# EAGLE board clock (EAGLE 7.1.0)

Size 100 x 80 mm. Coordinates in mm from the lower left corner, seen from the top.
Outline: 0,0 100,0 100,80 0,80 0,0
Copper layers (1*16): Top 0.035mm / dielectric 1.5mm / Bottom 0.035mm
Design rules "default": minimum track width 10mil, minimum drill 24mil, track to track 8mil, track to pad 8mil, pad to pad 8mil, via to via 8mil, smd to smd 8mil, copper to edge 40mil, drill to drill 8mil, minimum pad ring 10mil, minimum via ring 8mil, stop-mask expansion 4mil, vias tented up to drill 0mil, thermal gap 10mil

## Footprints (pad centres in the part's own frame; a part is rotated, then mirrored left to right if it is on the bottom)
1X06 = drill 1.016 long: 1 -6.35,0; 2 -3.81,0; 3 -1.27,0; 4 1.27,0; 5 3.81,0; 6 6.35,0
DIL20 = drill 0.813 long: 1 -11.43,-3.81; 2 -8.89,-3.81; 3 -6.35,-3.81; 4 -3.81,-3.81; 5 -1.27,-3.81; 6 1.27,-3.81; 7 3.81,-3.81; 8 6.35,-3.81; 9 8.89,-3.81; 10 11.43,-3.81; 11 11.43,3.81; 12 8.89,3.81; 13 6.35,3.81; 14 3.81,3.81; 15 1.27,3.81; 16 -1.27,3.81; 17 -3.81,3.81; 18 -6.35,3.81; 19 -8.89,3.81; 20 -11.43,3.81
LD-S400UHR-C = drill 1 long: 1 -10.62,-53.04; 2 -5.54,-53.05; 3 -0.46,-53.08; 4 4.62,-53.08; 5 9.7,-53.08; 6 12.24,53.5; 7 7.16,53.5; 8 2.08,53.5; 9 -3,53.5; 10 -8.08,53.5
SA23-12SRWA = drill 1 long: 1 -5.08,-30.08; 2 -2.54,-30.08; 3 0,-30.08; 4 2.54,-30.08; 5 5.08,-30.08; 6 5.08,29.98; 7 2.54,29.98; 8 0,29.98; 9 -2.54,29.98; 10 -5.08,29.98
TO220BV = drill 1.016 long: D 0,-2.54; G -2.54,-2.54; S 2.54,-2.54
TO92 = drill 0.813 octagon: 1 1.27,0; 2 0,1.905; 3 -1.27,0
0207/12 = drill 0.813 octagon: 1 -6.35,0; 2 6.35,0

## Placement (x,y rotation side)
CONTROL  JP_1  [1X06]  -94.31,248.92 0 top  (outside the outline)
IC1  TPIC6B595N  [DIL20]  25.07,252.73 0 top  (outside the outline)
IC2  TPIC6B595N  [DIL20]  -2.87,252.73 0 top  (outside the outline)
LED_BIG_1  7-SEG_LD-S400UHR-C  [LD-S400UHR-C]  41.58,62.23 0 top
LED_BIG_2  7-SEG_LD-S400UHR-C  [LD-S400UHR-C]  -48.59,62.23 0 top  (outside the outline)
LED_BIG_3  7-SEG_LD-S400UHR-C  [LD-S400UHR-C]  41.58,185.42 0 top  (outside the outline)
LED_BIG_4  7-SEG_LD-S400UHR-C  [LD-S400UHR-C]  -48.59,185.42 0 top  (outside the outline)
LED_SMALL_1  7-SEG_SA23-12SRWA  [SA23-12SRWA]  -118.44,158.75 0 top  (outside the outline)
LED_SMALL_2  7-SEG_SA23-12SRWA  [SA23-12SRWA]  63.17,281.94 0 top  (outside the outline)
POWER  JP_2  [1X06]  -110.82,248.92 0 top  (outside the outline)
Q1  IRF9530  [TO220BV]  -23.19,255.27 0 top  (outside the outline)
Q2  IRF9530  [TO220BV]  -34.62,255.27 0 top  (outside the outline)
Q3  BC547A  [TO92]  -129.87,248.92 0 top  (outside the outline)
Q4  BC547A  [TO92]  -143.84,248.92 0 top  (outside the outline)
Q5  IRF9530  [TO220BV]  -46.05,255.27 0 top  (outside the outline)
Q6  BC547A  [TO92]  75.87,320.04 0 top  (outside the outline)
Q7  IRF9530  [TO220BV]  -57.48,255.27 0 top  (outside the outline)
Q8  BC547A  [TO92]  61.9,320.04 0 top  (outside the outline)
Q9  IRF9530  [TO220BV]  -68.91,255.27 0 top  (outside the outline)
Q10  BC547A  [TO92]  47.93,320.04 0 top  (outside the outline)
Q11  IRF9530  [TO220BV]  -80.34,255.27 0 top  (outside the outline)
Q12  BC547A  [TO92]  33.96,320.04 0 top  (outside the outline)
R1  22k  [0207/12]  23.8,318.77 0 top  (outside the outline)
R2  220  [0207/12]  8.56,318.77 0 top  (outside the outline)
R3  22k  [0207/12]  -6.68,318.77 0 top  (outside the outline)
R4  2.2k  [0207/12]  -21.92,318.77 0 top  (outside the outline)
R5  2.2k  [0207/12]  -37.16,318.77 0 top  (outside the outline)
R6  22k  [0207/12]  -52.4,318.77 0 top  (outside the outline)
R7  220  [0207/12]  -67.64,318.77 0 top  (outside the outline)
R8  220  [0207/12]  -82.88,318.77 0 top  (outside the outline)
R9  22k  [0207/12]  -98.12,318.77 0 top  (outside the outline)
R10  220  [0207/12]  -113.36,318.77 0 top  (outside the outline)
R11  2.2k  [0207/12]  -128.6,318.77 0 top  (outside the outline)
R12  2.2k  [0207/12]  79.68,325.12 0 top  (outside the outline)
R13  22R  [0207/12]  64.44,325.12 0 top  (outside the outline)
R14  22R  [0207/12]  49.2,325.12 0 top  (outside the outline)
R15  22R  [0207/12]  33.96,325.12 0 top  (outside the outline)
R16  22R  [0207/12]  18.72,325.12 0 top  (outside the outline)
R17  22R  [0207/12]  3.48,325.12 0 top  (outside the outline)
R18  22R  [0207/12]  -11.76,325.12 0 top  (outside the outline)
R19  22R  [0207/12]  -27,325.12 0 top  (outside the outline)
R20  560R  [0207/12]  -42.24,325.12 0 top  (outside the outline)
R21  22k  [0207/12]  -57.48,325.12 0 top  (outside the outline)
R22  220  [0207/12]  -72.72,325.12 0 top  (outside the outline)
R23  22k  [0207/12]  -87.96,325.12 0 top  (outside the outline)
R24  220  [0207/12]  -103.2,325.12 0 top  (outside the outline)
R25  2.2k  [0207/12]  -118.44,325.12 0 top  (outside the outline)
R26  2.2k  [0207/12]  -133.68,325.12 0 top  (outside the outline)
R27  22R  [0207/12]  79.68,330.2 0 top  (outside the outline)
R28  22R  [0207/12]  64.44,330.2 0 top  (outside the outline)
R29  22R  [0207/12]  49.2,330.2 0 top  (outside the outline)
R30  22R  [0207/12]  33.96,330.2 0 top  (outside the outline)
R31  22R  [0207/12]  18.72,330.2 0 top  (outside the outline)
R32  22R  [0207/12]  3.48,330.2 0 top  (outside the outline)
R33  22R  [0207/12]  -11.76,330.2 0 top  (outside the outline)
R34  22R  [0207/12]  -27,330.2 0 top  (outside the outline)

## Library data of the parts
CONTROL POWER = pinhead
IC1 IC2 LED_BIG_1-LED_BIG_4 LED_SMALL_1 LED_SMALL_2 = NumericDisplay
Q1 Q2 Q5 Q7 Q9 Q11 = transistor-power
Q3 Q4 Q6 Q8 Q10 Q12 = transistor-npn
R1-R34 = resistor

## Nets
+12V: POWER.1 Q1.S Q2.S Q5.S Q7.S Q9.S Q11.S R1.2 R3.2 R6.2 R9.2 R21.2 R23.2
B_1: IC2.4 R4.1
B_2: IC2.5 R5.1
B_3: IC2.6 R11.1
B_4: IC2.7 R12.1
D0: IC1.4 R13.1 R27.1
D1: IC1.5 R14.1 R28.1
D2: IC1.6 R15.1 R29.1
D3: IC1.7 R16.1 R30.1
D4: IC1.14 R17.1 R31.1
D5: IC1.15 R18.1 R32.1
D6: IC1.16 R19.1 R33.1
D7: IC1.17 R20.1 R34.1
G: CONTROL.4 IC2.9
GND: CONTROL.6 IC1.9 IC1.10 IC1.11 IC1.19 IC2.10 IC2.11 IC2.19 POWER.6 Q3.1 Q4.1 Q6.1 Q8.1 Q10.1 Q12.1
L_A: LED_BIG_1.7 LED_BIG_2.7 LED_BIG_3.7 LED_BIG_4.7 R13.2
L_B: LED_BIG_1.6 LED_BIG_2.6 LED_BIG_3.6 LED_BIG_4.6 R14.2
L_C: LED_BIG_1.4 LED_BIG_2.4 LED_BIG_3.4 LED_BIG_4.4 R15.2
L_D: LED_BIG_1.3 LED_BIG_2.3 LED_BIG_3.3 LED_BIG_4.3 R16.2
L_DP: LED_BIG_1.5 LED_BIG_2.5 LED_BIG_3.5 LED_BIG_4.5 R20.2
L_E: LED_BIG_1.2 LED_BIG_2.2 LED_BIG_3.2 LED_BIG_4.2 R17.2
L_F: LED_BIG_1.9 LED_BIG_2.9 LED_BIG_3.9 LED_BIG_4.9 R18.2
L_G: LED_BIG_1.10 LED_BIG_2.10 LED_BIG_3.10 LED_BIG_4.10 R19.2
LS_A: LED_SMALL_1.7 LED_SMALL_2.7 R27.2
LS_B: LED_SMALL_1.6 LED_SMALL_2.6 R28.2
LS_C: LED_SMALL_1.4 LED_SMALL_2.4 R29.2
LS_D: LED_SMALL_1.2 LED_SMALL_2.2 R30.2
LS_DP: LED_SMALL_1.5 LED_SMALL_2.5 R34.2
LS_E: LED_SMALL_1.1 LED_SMALL_2.1 R31.2
LS_F: LED_SMALL_1.9 LED_SMALL_2.9 R32.2
LS_G: LED_SMALL_1.10 LED_SMALL_2.10 R33.2
N$1: LED_BIG_4.1 LED_BIG_4.8 Q1.D
N$2: Q1.G R1.1 R2.2
N$3: Q3.3 R2.1
N$4: LED_BIG_3.1 LED_BIG_3.8 Q5.D
N$5: Q5.G R6.1 R7.2
N$6: Q6.3 R7.1
N$7: Q2.G R3.1 R8.2
N$8: Q4.3 R8.1
N$9: LED_BIG_2.1 LED_BIG_2.8 Q2.D
N$10: Q7.G R9.1 R10.2
N$11: Q8.3 R10.1
N$12: LED_BIG_1.1 LED_BIG_1.8 Q7.D
N$13: Q8.2 R4.2
N$14: Q4.2 R5.2
N$15: Q6.2 R11.2
N$16: Q3.2 R12.2
N$17: IC1.3 IC2.18
N$42: LED_SMALL_2.3 LED_SMALL_2.8 Q9.D
N$43: Q9.G R21.1 R22.2
N$44: Q10.3 R22.1
N$45: Q11.G R23.1 R24.2
N$46: Q12.3 R24.1
N$47: LED_SMALL_1.3 LED_SMALL_1.8 Q11.D
N$48: Q12.2 R25.2
N$49: Q10.2 R26.2
RCK: CONTROL.3 IC1.12 IC2.12
S_1: IC2.14 R25.1
S_2: IC2.15 R26.1
SER_IN: CONTROL.1 IC2.3
SRCK: CONTROL.2 IC1.13 IC2.13
VCC: CONTROL.5 IC1.2 IC1.8 IC2.2 IC2.8

## Tracks (layer width: path | path; a pad name or v marks a point on that pad's centre or on a via)
+12V  (12 unrouted)
B_1  (1 unrouted)
B_2  (1 unrouted)
B_3  (1 unrouted)
B_4  (1 unrouted)
D0  (2 unrouted)
D1  (2 unrouted)
D2  (2 unrouted)
D3  (2 unrouted)
D4  (2 unrouted)
D5  (2 unrouted)
D6  (2 unrouted)
D7  (2 unrouted)
G  (1 unrouted)
GND  (14 unrouted)
L_A  (4 unrouted)
L_B  (4 unrouted)
L_C  (4 unrouted)
L_D  (4 unrouted)
L_DP  (4 unrouted)
L_E  (4 unrouted)
L_F  (4 unrouted)
L_G  (4 unrouted)
LS_A  (2 unrouted)
LS_B  (2 unrouted)
LS_C  (2 unrouted)
LS_D  (2 unrouted)
LS_DP  (2 unrouted)
LS_E  (2 unrouted)
LS_F  (2 unrouted)
LS_G  (2 unrouted)
N$1  (2 unrouted)
N$2  (2 unrouted)
N$3  (1 unrouted)
N$4  (2 unrouted)
N$5  (2 unrouted)
N$6  (1 unrouted)
N$7  (2 unrouted)
N$8  (1 unrouted)
N$9  (2 unrouted)
N$10  (2 unrouted)
N$11  (1 unrouted)
N$12  (2 unrouted)
N$13  (1 unrouted)
N$14  (1 unrouted)
N$15  (1 unrouted)
N$16  (1 unrouted)
N$17  (1 unrouted)
N$42  (2 unrouted)
N$43  (2 unrouted)
N$44  (1 unrouted)
N$45  (2 unrouted)
N$46  (1 unrouted)
N$47  (2 unrouted)
N$48  (1 unrouted)
N$49  (1 unrouted)
RCK  (2 unrouted)
S_1  (1 unrouted)
S_2  (1 unrouted)
SER_IN  (1 unrouted)
SRCK  (2 unrouted)
VCC  (4 unrouted)